# EAGLE board untitled (EAGLE 9.6.2)
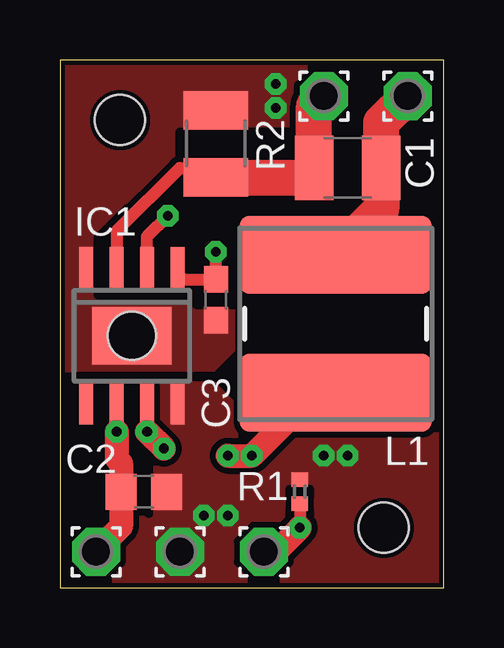
[diagram p0: board, top side]
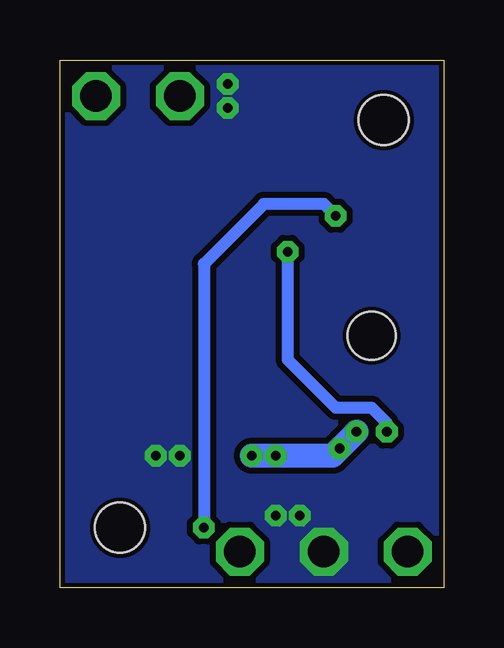
[diagram p1: board, bottom side, seen from below]

Size 16 x 22 mm. Coordinates in mm from the lower left corner, seen from the top.
Outline: 16,0 16,22 0,22 0,0 16,0
Copper layers (1*16): Top 0.035mm / dielectric 1.5mm / Bottom 0.035mm
Design rules "SeeedStudio_2layer_DRU_no_angle_20140221_IMD555 *": minimum track width 0.3mm, minimum drill 0.4mm, track to track 0.25mm, track to pad 0.3mm, pad to pad 0.25mm, via to via 0.3mm, smd to smd 0mil, copper to edge 0.2mm, drill to drill 10mil, minimum pad ring 0.25mm, minimum via ring 0.2mm, stop-mask expansion 0.03mm, vias tented up to drill 5mm, thermal gap 0.25mm
Holes 2.1 mm at 13.5,2.5 2.5,19.5
Holes 2 mm at 3,10.5
tRestrict: 14 lines

## Footprints (pad centres in the part's own frame; a part is rotated, then mirrored left to right if it is on the bottom)
C1210 = smd 1.6 x 2.7: 1 -1.4,0; 2 1.4,0
C0805 = smd 1.3 x 1.5: 1 -0.95,0; 2 0.95,0
C0603 = smd 1.1 x 1: 1 -0.85,0; 2 0.85,0
HSOP8 = smd 0.6 x 1.8: 1 -1.905,-2.8; 2 -0.635,-2.8; 3 0.635,-2.8; 4 1.905,-2.8; 5 1.905,2.8; 6 0.635,2.8; 7 -0.635,2.8; 8 -1.905,2.8 | smd 3.3 x 2.4: EP 0,0
L8080 = smd 8 x 3.25: 1 0,2.875; 2 0,-2.875
2.0/1.3 = drill 1.3 pad 2 octagon: 1 0,0
R0402 = smd 0.6 x 0.7: 1 -0.5,0; 2 0.5,0
R1210 = smd 1.6 x 2.7: 1 -1.4,0; 2 1.4,0

## Placement (x,y rotation side)
C1  [C1210]  12,17.5 180 top
C2  [C0805]  3.5,4 0 top
C3  1u  [C0603]  6.5,12 270 top
IC1  LED2001  [HSOP8]  3,10.5 180 top
L1  [L8080]  11.5,11 180 top
PAD1  WIREPAD2.0/1.2  [2.0/1.3]  1.5,1.5 90 top
PAD2  WIREPAD2.0/1.2  [2.0/1.3]  8.5,1.5 90 top
PAD3  WIREPAD2.0/1.2  [2.0/1.3]  14.5,20.5 90 top
PAD4  WIREPAD2.0/1.2  [2.0/1.3]  11,20.5 90 top
PAD5  WIREPAD2.0/1.2  [2.0/1.3]  5,1.5 90 top
R1  10k  [R0402]  10,4 270 top
R2  [R1210]  6.5,18.5 90 top

## Library data of the parts
C1-C3 = rcl; SPICEPREFIX: C
IC1 = 0 my parts
L1 = 2 RCL
PAD1-PAD5 = 4 PAD
R1 R2 = rcl; SPICEPREFIX: R

## Nets
GND: C2.2 C3.2 IC1.4 IC1.8 IC1.EP PAD5.1 R1.1 R2.2
N$1: IC1.7 L1.1
N$6: C1.1 L1.2 PAD3.1
N$13: C1.2 IC1.3 PAD4.1 R2.1
N$15: IC1.2 PAD2.1 R1.2
V+: C2.1 C3.1 IC1.1 IC1.6 PAD1.1

## Tracks (layer width: path | path; a pad name or v marks a point on that pad's centre or on a via)
GND  (via drill 0.4 pad 0.9)
  other vias: 9,20 9,21 6,3 7,3 12,5.5 11,5.5
  pour Top (rank 6, no thermals): 0,0 0,22 16,22 16,0
  pour Bottom (rank 6, no thermals): 0,0 0,22 16,22 16,0
N$1  (via drill 0.4 pad 0.9)
  Top 0.5: IC1.7 v3.63,6.5
  Top 1: v3.63,6.5 v4.33,5.8 | v7,5.5 v8,5.5 10.62,8.12 L1.1
  Bottom 1: v3.63,6.5 4.63,5.5 v7,5.5 v8,5.5
N$6
  Top 1.5: PAD3.1 13.4,19.4 C1.1 13.4,15.78 L1.2
N$13
  Top 0.5: IC1.3 2.37,14.87 5,17.5 6.1,17.5 R2.1
  Top 1: R2.1 6.6,17
  Top 1.5: R2.1 10.2,17.1 C1.2 10.6,20.1 PAD4.1
N$15  (via drill 0.4 pad 0.9)
  Top 0.5: IC1.2 3.63,14.63 v4.5,15.5 | R1.2 v10,2.5
  Top 1: v10,2.5 9,1.5 PAD2.1
  Bottom 0.5: v4.5,15.5 5,16 7.5,16 10,13.5 v10,2.5
V+  (via drill 0.4 pad 0.9)
  Top 0.5: IC1.6 v2.37,6.5 | v6.5,14 C3.1 5.15,12.85 4.91,13.1 IC1.1
  Top 1: v2.37,6.5 2.37,5.37 2.55,5.18 C2.1 2.55,2.55 PAD1.1
  Bottom 0.5: v6.5,14 6.5,9.5 4.5,7.5 3,7.5 2.37,6.87 v2.37,6.5